# EAGLE board NixieDriverPower-panel (EAGLE 7.1.0)
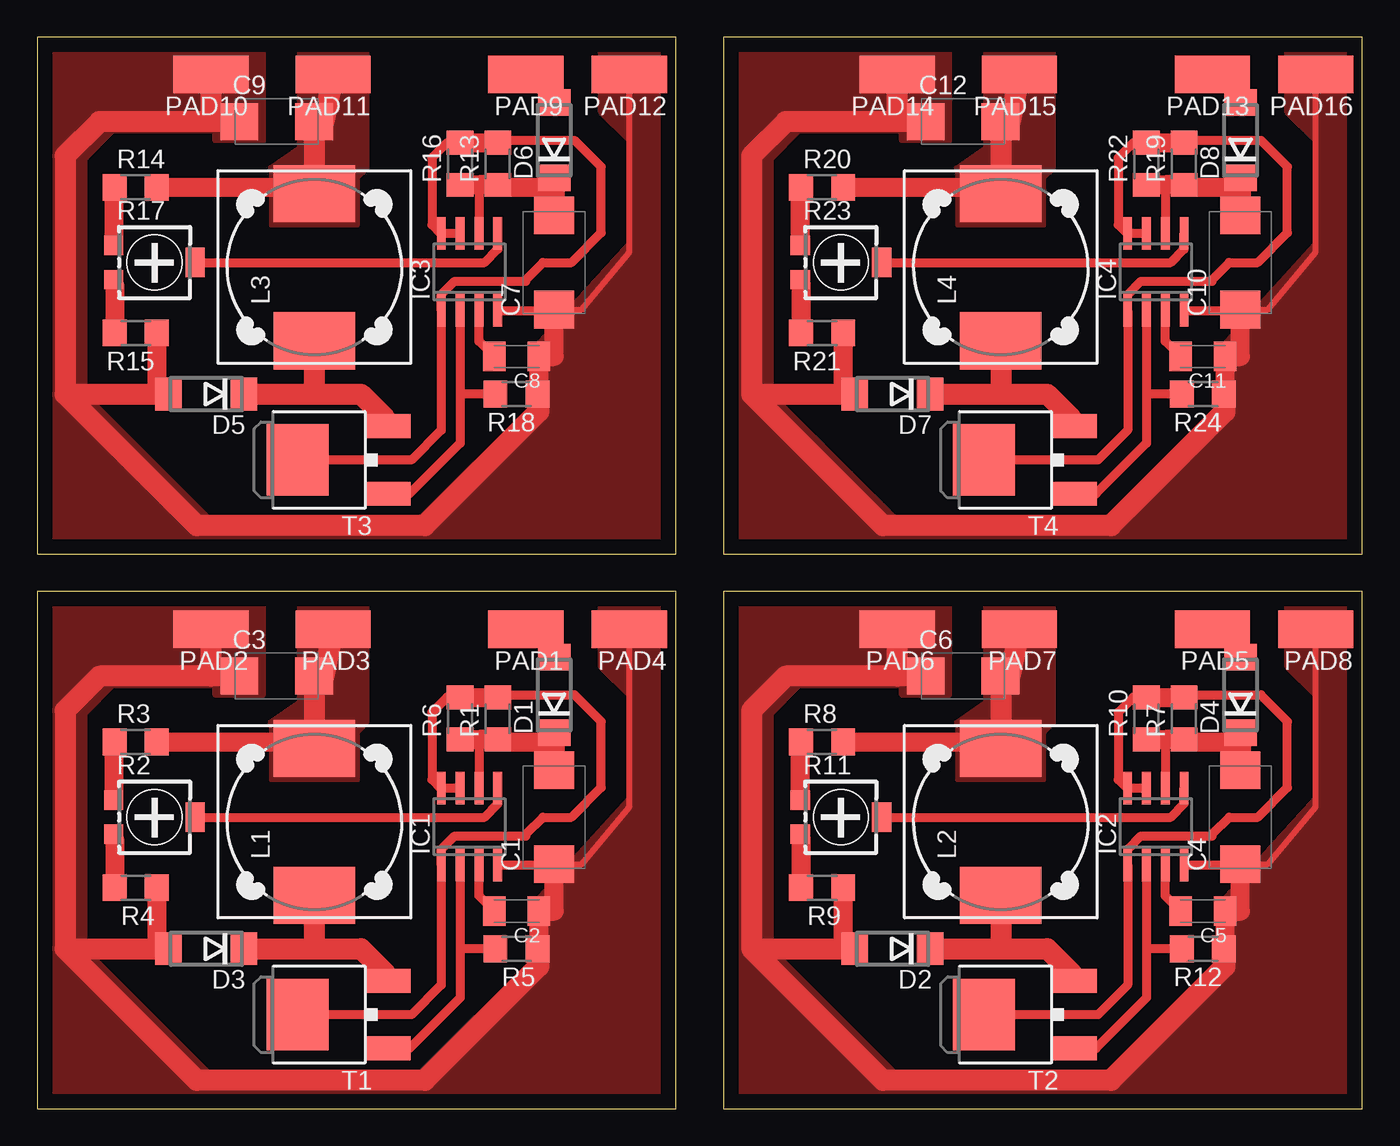
[diagram p0: board, top side]

Size 89.52 x 72.38 mm. Coordinates in mm from the lower left corner, seen from the top.
Outline: 0,0 43.17,0 43.17,34.91 0,34.91 0,0
Outline: 46.36,0 89.52,0 89.52,34.91 46.36,34.91 46.36,0
Outline: 0,37.47 43.17,37.47 43.17,72.38 0,72.38 0,37.47
Outline: 46.36,37.47 89.52,37.47 89.52,72.38 46.36,72.38 46.36,37.47
Copper layers (1*16): Top 0.035mm / dielectric 1.5mm / Bottom 0.035mm
Design rules "default": minimum track width 10mil, minimum drill 24mil, track to track 8mil, track to pad 8mil, pad to pad 8mil, via to via 8mil, smd to smd 8mil, copper to edge 40mil, drill to drill 8mil, minimum pad ring 10mil, minimum via ring 8mil, stop-mask expansion 4mil, vias tented up to drill 0mil, thermal gap 10mil

## Footprints (pad centres in the part's own frame; a part is rotated, then mirrored left to right if it is on the bottom)
D/7343-31R = smd 2.55 x 2.7: + 3.175,0; - -3.175,0
C1206K = smd 1.5 x 2: 1 -1.5,0; 2 1.5,0
C/6032-28R = smd 2.55 x 2.5: + 2.525,0; - -2.525,0
DO214AA = smd 1.8 x 2.2: A 2.55,0; C -2.55,0
SOIC8 = smd 0.6 x 2.2: 1 -1.905,-2.6; 2 -0.635,-2.6; 3 0.635,-2.6; 4 1.905,-2.6; 5 1.905,2.6; 6 0.635,2.6; 7 -0.635,2.6; 8 -1.905,2.6
DR125 = smd 3.85 x 5.5: 1 -4.975,0; 2 4.975,0
SMD2,54-5,08 = smd 2.54 x 5.08: 1 0,0
R1206 = smd 1.6 x 1.803: 1 -1.422,0; 2 1.422,0
RTRIM4G/J = smd 1.3 x 1.3: 1 -1.15,-2.75; 3 1.15,-2.75 | smd 2 x 1.3: 2 0,2.75
DPAK = smd 1.6 x 3: 1 -2.28,-4.04; 3 2.28,-4.04 | smd 4.826 x 4.191: 4 0,2.096

## Placement (x,y rotation side)
C1  100uF  [D/7343-31R]  34.93,19.68 90 top
C2  470pF  [C1206K]  32.39,13.34 180 top
C3  40uF  [C/6032-28R]  16.19,29.21 0 top
C4  100uF  [D/7343-31R]  81.28,19.68 90 top
C5  470pF  [C1206K]  78.74,13.34 180 top
C6  40uF  [C/6032-28R]  62.55,29.21 0 top
C7  100uF  [D/7343-31R]  34.93,57.15 90 top
C8  470pF  [C1206K]  32.39,50.8 180 top
C9  40uF  [C/6032-28R]  16.19,66.67 0 top
C10  100uF  [D/7343-31R]  81.28,57.15 90 top
C11  470pF  [C1206K]  78.74,50.8 180 top
C12  40uF  [C/6032-28R]  62.55,66.67 0 top
D1  MURS120  [DO214AA]  34.93,27.94 90 top
D2  MURS120  [DO214AA]  57.79,10.79 180 top
D3  MURS120  [DO214AA]  11.43,10.79 180 top
D4  MURS120  [DO214AA]  81.28,27.94 90 top
D5  MURS120  [DO214AA]  11.43,48.26 180 top
D6  MURS120  [DO214AA]  34.93,65.41 90 top
D7  MURS120  [DO214AA]  57.79,48.26 180 top
D8  MURS120  [DO214AA]  81.28,65.41 90 top
IC1  MC34063AD  [SOIC8]  29.21,19.05 0 top
IC2  MC34063AD  [SOIC8]  75.56,19.05 0 top
IC3  MC34063AD  [SOIC8]  29.21,56.52 0 top
IC4  MC34063AD  [SOIC8]  75.56,56.52 0 top
L1  220uH  [DR125]  18.73,19.37 90 top
L2  220uH  [DR125]  65.09,19.37 90 top
L3  220uH  [DR125]  18.73,56.83 90 top
L4  220uH  [DR125]  65.09,56.83 90 top
PAD1  [SMD2,54-5,08]  33.02,32.38 90 top
PAD2  [SMD2,54-5,08]  11.75,32.38 90 top
PAD3  [SMD2,54-5,08]  20,32.38 90 top
PAD4  [SMD2,54-5,08]  40.01,32.38 90 top
PAD5  [SMD2,54-5,08]  79.38,32.38 90 top
PAD6  [SMD2,54-5,08]  58.1,32.38 90 top
PAD7  [SMD2,54-5,08]  66.36,32.38 90 top
PAD8  [SMD2,54-5,08]  86.36,32.38 90 top
PAD9  [SMD2,54-5,08]  33.02,69.85 90 top
PAD10  [SMD2,54-5,08]  11.75,69.85 90 top
PAD11  [SMD2,54-5,08]  20,69.85 90 top
PAD12  [SMD2,54-5,08]  40.01,69.85 90 top
PAD13  [SMD2,54-5,08]  79.38,69.85 90 top
PAD14  [SMD2,54-5,08]  58.1,69.85 90 top
PAD15  [SMD2,54-5,08]  66.36,69.85 90 top
PAD16  [SMD2,54-5,08]  86.36,69.85 90 top
R1  0.75  [R1206]  31.11,26.35 90 top
R2  1k  [RTRIM4G/J]  7.94,19.68 270 top
R3  12k  [R1206]  6.67,24.77 0 top
R4  4.7k  [R1206]  6.67,14.92 180 top
R5  1.5k  [R1206]  32.39,10.79 180 top
R6  0.75  [R1206]  28.57,26.35 90 top
R7  0.75  [R1206]  77.47,26.35 90 top
R8  12k  [R1206]  53.02,24.77 0 top
R9  4.7k  [R1206]  53.02,14.92 180 top
R10  0.75  [R1206]  74.93,26.35 90 top
R11  1k  [RTRIM4G/J]  54.29,19.68 270 top
R12  1.5k  [R1206]  78.74,10.79 180 top
R13  0.75  [R1206]  31.11,63.82 90 top
R14  12k  [R1206]  6.67,62.23 0 top
R15  4.7k  [R1206]  6.67,52.39 180 top
R16  0.75  [R1206]  28.57,63.82 90 top
R17  1k  [RTRIM4G/J]  7.94,57.15 270 top
R18  1.5k  [R1206]  32.39,48.26 180 top
R19  0.75  [R1206]  77.47,63.82 90 top
R20  12k  [R1206]  53.02,62.23 0 top
R21  4.7k  [R1206]  53.02,52.39 180 top
R22  0.75  [R1206]  74.93,63.82 90 top
R23  1k  [RTRIM4G/J]  54.29,57.15 270 top
R24  1.5k  [R1206]  78.74,48.26 180 top
T1  MJD31  [DPAK]  19.68,6.35 90 top
T2  MJD31  [DPAK]  66.04,6.35 90 top
T3  MJD31  [DPAK]  19.68,43.81 90 top
T4  MJD31  [DPAK]  66.04,43.81 90 top

## Library data of the parts
C1-C12 R2 R11 R17 R23 = rcl
D1-D8 = diode
IC1-IC4 = mc34063
L1-L4 = inductors
PAD1-PAD16 = wirepad
R1 R3-R10 R12-R16 R18-R22 R24 = rcl-2
T1-T4 = transistor

## Nets
GND: C1.- C2.1 C3.- D3.A IC1.4 PAD2.1 PAD4.1 R4.1 R5.1
GND1: C4.- C5.1 C6.- D2.A IC2.4 PAD6.1 PAD8.1 R9.1 R12.1
GND2: C7.- C8.1 C9.- D5.A IC3.4 PAD10.1 PAD12.1 R15.1 R18.1
GND3: C10.- C11.1 C12.- D7.A IC4.4 PAD14.1 PAD16.1 R21.1 R24.1
N$1: D3.C L1.1 T1.3
N$2: C2.2 IC1.3
N$3: IC1.1 IC1.7 IC1.8 R1.2 R6.2 T1.4
N$4: IC1.2 R5.2 T1.1
N$5: IC2.1 IC2.7 IC2.8 R7.2 R10.2 T2.4
N$6: C3.+ L1.2 PAD3.1 R3.2
N$7: IC1.5 R2.2
N$8: C5.2 IC2.3
N$9: R2.1 R3.1
N$10: R2.3 R4.2
N$11: IC2.5 R11.2
N$12: D1.A PAD1.1
N$13: C6.+ L2.2 PAD7.1 R8.2
N$14: R8.1 R11.1
N$15: R9.2 R11.3
N$16: D4.A PAD5.1
N$17: IC2.2 R12.2 T2.1
N$18: D2.C L2.1 T2.3
N$19: IC3.1 IC3.7 IC3.8 R13.2 R16.2 T3.4
N$20: C8.2 IC3.3
N$21: IC3.5 R17.2
N$22: C9.+ L3.2 PAD11.1 R14.2
N$23: R14.1 R17.1
N$24: R15.2 R17.3
N$25: D6.A PAD9.1
N$26: IC3.2 R18.2 T3.1
N$27: D5.C L3.1 T3.3
N$28: IC4.1 IC4.7 IC4.8 R19.2 R22.2 T4.4
N$29: C11.2 IC4.3
N$30: IC4.5 R23.2
N$31: C12.+ L4.2 PAD15.1 R20.2
N$32: R20.1 R23.1
N$33: R21.2 R23.3
N$34: D8.A PAD13.1
N$35: IC4.2 R24.2 T4.1
N$36: D7.C L4.1 T4.3
VCC: C1.+ D1.C IC1.6 R1.1 R6.1
VCC1: C4.+ D4.C IC2.6 R7.1 R10.1
VCC2: C7.+ D6.C IC3.6 R13.1 R16.1
VCC3: C10.+ D8.C IC4.6 R19.1 R22.1

## Tracks (layer width: path | path; a pad name or v marks a point on that pad's centre or on a via)
GND
  Top 0.406: PAD4.1 40.01,20.39 36.76,16.51 C1.- 34.93,16.45 | C3.- 11.75,29.21 | 33.89,10.79 R5.1
  Top 0.61: IC1.4 34.93,16.45
  Top 1.27: R4.1 8.09,10.79 | 33.89,10.79 C2.1 34.93,13.34 C1.-
  Top 1.422: 11.75,29.21 PAD2.1 | D3.A 8.09,10.79 1.91,10.79 | C3.- 4.23,29.21 1.91,26.89 1.91,10.79 | 33.89,10.79 33.89,9.61 26.18,1.91 10.79,1.91 1.91,10.79
  pour Top (no thermals): 43.18,34.92 43.18,0 0,0 0,34.92 15.24,34.92 15.24,27.94 12.06,27.94 12.06,28.57 5.08,28.57 3.17,26.67 3.17,10.79 11.75,2.22 25.72,2.22 33.66,10.16 33.66,13.97 40.01,20.95 40.01,27.94 38.1,29.84 38.1,34.92
GND1
  Top 0.406: PAD8.1 86.36,20.39 83.12,16.51 C4.- 81.28,16.45 | C6.- 58.1,29.21 | 80.24,10.79 R12.1
  Top 0.61: IC2.4 81.28,16.45
  Top 1.27: R9.1 54.45,10.79 | 80.24,10.79 C5.1 81.28,13.34 C4.-
  Top 1.422: 58.1,29.21 PAD6.1 | D2.A 54.45,10.79 48.26,10.79 | C6.- 50.58,29.21 48.26,26.89 48.26,10.79 | 80.24,10.79 80.24,9.61 72.54,1.91 57.15,1.91 48.26,10.79
  pour Top (no thermals): 89.53,34.92 89.53,0 46.36,0 46.36,34.92 61.59,34.92 61.59,27.94 58.42,27.94 58.42,28.57 51.44,28.57 49.53,26.67 49.53,10.79 58.1,2.22 72.07,2.22 80.01,10.16 80.01,13.97 86.36,20.95 86.36,27.94 84.45,29.84 84.45,34.92
GND2
  Top 0.406: PAD12.1 40.01,57.85 36.76,53.98 C7.- 34.93,53.91 | C9.- 11.75,66.67 | 33.89,48.26 R18.1
  Top 0.61: IC3.4 34.93,53.91
  Top 1.27: R15.1 8.09,48.26 | 33.89,48.26 C8.1 34.93,50.8 C7.-
  Top 1.422: 11.75,66.67 PAD10.1 | D5.A 8.09,48.26 1.91,48.26 | C9.- 4.23,66.67 1.91,64.35 1.91,48.26 | 33.89,48.26 33.89,47.07 26.18,39.37 10.79,39.37 1.91,48.26
  pour Top (no thermals): 43.18,72.39 43.18,37.47 0,37.47 0,72.39 15.24,72.39 15.24,65.41 12.06,65.41 12.06,66.04 5.08,66.04 3.17,64.14 3.17,48.26 11.75,39.69 25.72,39.69 33.66,47.62 33.66,51.44 40.01,58.42 40.01,65.41 38.1,67.31 38.1,72.39
GND3
  Top 0.406: PAD16.1 86.36,57.85 83.12,53.98 C10.- 81.28,53.91 | C12.- 58.1,66.67 | 80.24,48.26 R24.1
  Top 0.61: IC4.4 81.28,53.91
  Top 1.27: R21.1 54.45,48.26 | 80.24,48.26 C11.1 81.28,50.8 C10.-
  Top 1.422: 58.1,66.67 PAD14.1 | D7.A 54.45,48.26 48.26,48.26 | C12.- 50.58,66.67 48.26,64.35 48.26,48.26 | 80.24,48.26 80.24,47.07 72.54,39.37 57.15,39.37 48.26,48.26
  pour Top (no thermals): 89.53,72.39 89.53,37.47 46.36,37.47 46.36,72.39 61.59,72.39 61.59,65.41 58.42,65.41 58.42,66.04 51.44,66.04 49.53,64.14 49.53,48.26 58.1,39.69 72.07,39.69 80.01,47.62 80.01,51.44 86.36,58.42 86.36,65.41 84.45,67.31 84.45,72.39
N$1
  Top 0.406: 23.49,9.18 23.49,8.63
  Top 1.422: L1.1 18.73,10.79 | 18.73,10.79 21.88,10.79 23.49,9.18 | 23.49,8.63 T1.3 | D3.C 18.73,10.79
N$2
  Top 0.61: C2.2 29.84,14.38 IC1.3
N$3
  Top 0.406: 27.3,21.59 IC1.8 | 33.02,18.41 33.02,18.54 | R1.2 31.11,27.94
  Top 0.61: IC1.8 IC1.7 | T1.4 25.3,6.35 27.3,8.36 IC1.1 27.3,17.52 28.2,18.41 33.02,18.41 | R6.2 27.68,27.77 26.67,26.76 26.67,22.23 27.3,21.59 | 33.02,18.54 34.16,19.68 36.09,19.68 38.1,21.69 38.1,26.14 36.3,27.94 31.11,27.94
  Top 1.27: R6.2 R1.2
N$4
  Top 0.61: IC1.2 28.57,10.79 | 28.57,10.79 28.57,7.48 25.16,4.07 T1.1 | R5.2 28.57,10.79
N$5
  Top 0.406: 73.66,21.59 IC2.8 | 79.38,18.41 79.38,18.54 | R7.2 77.47,27.94
  Top 0.61: IC2.8 IC2.7 | T2.4 71.65,6.35 73.66,8.36 IC2.1 73.66,17.52 74.56,18.41 79.38,18.41 | R10.2 74.04,27.77 73.02,26.76 73.02,22.23 73.66,21.59 | 79.38,18.54 80.52,19.68 82.45,19.68 84.45,21.69 84.45,26.14 82.66,27.94 77.47,27.94
  Top 1.27: R10.2 R7.2
N$6
  Top 0.406: 18.1,24.77 L1.2
  Top 1.27: R3.2 18.1,24.77
  Top 1.422: PAD3.1 19.37,29.21 18.73,29.21 | 18.73,29.21 C3.+ | 18.73,29.21 L1.2
  pour Top (no thermals): 15.88,22.23 15.88,26.04 15.73,26.04 17.78,27.45 17.78,34.92 22.22,34.92 22.22,26.04 21.59,25.4 21.59,22.23
N$7
  Top 0.61: R2.2 30.22,19.68 31.11,20.58 IC1.5
N$8
  Top 0.61: C5.2 76.2,14.38 IC2.3
N$9
  Top 0.406: R3.1 5.19,24.45
  Top 1.27: 5.19,24.45 R2.1
N$10
  Top 0.406: R2.3 5.25,18.22
  Top 1.27: 5.25,18.22 R4.2
N$11
  Top 0.61: R11.2 76.57,19.68 77.47,20.58 IC2.5
N$12
  Top 0.406: D1.A 34.93,32.38 PAD1.1
N$13
  Top 0.406: 64.45,24.77 L2.2
  Top 1.27: R8.2 64.45,24.77
  Top 1.422: PAD7.1 65.72,29.21 65.09,29.21 | 65.09,29.21 C6.+ | 65.09,29.21 L2.2
  pour Top (no thermals): 62.23,22.23 62.23,26.04 62.08,26.04 64.13,27.45 64.13,34.92 68.58,34.92 68.58,26.04 67.94,25.4 67.94,22.23
N$14
  Top 0.406: R8.1 51.54,24.45
  Top 1.27: 51.54,24.45 R11.1
N$15
  Top 0.406: R11.3 51.6,18.22
  Top 1.27: 51.6,18.22 R9.2
N$16
  Top 0.406: D4.A 81.28,32.38 PAD5.1
N$17
  Top 0.61: IC2.2 74.93,10.79 | 74.93,10.79 74.93,7.48 71.52,4.07 T2.1 | R12.2 74.93,10.79
N$18
  Top 0.406: 69.85,9.18 69.85,8.63
  Top 1.422: L2.1 65.09,10.79 | 65.09,10.79 68.23,10.79 69.85,9.18 | 69.85,8.63 T2.3 | D2.C 65.09,10.79
N$19
  Top 0.406: 27.3,59.05 IC3.8 | 33.02,55.88 33.02,56.01 | R13.2 31.11,65.41
  Top 0.61: IC3.8 IC3.7 | T3.4 25.3,43.81 27.3,45.82 IC3.1 27.3,54.98 28.2,55.88 33.02,55.88 | R16.2 27.68,65.24 26.67,64.23 26.67,59.69 27.3,59.05 | 33.02,56.01 34.16,57.15 36.09,57.15 38.1,59.16 38.1,63.61 36.3,65.41 31.11,65.41
  Top 1.27: R16.2 R13.2
N$20
  Top 0.61: C8.2 29.84,51.84 IC3.3
N$21
  Top 0.61: R17.2 30.22,57.15 31.11,58.05 IC3.5
N$22
  Top 0.406: 18.1,62.23 L3.2
  Top 1.27: R14.2 18.1,62.23
  Top 1.422: PAD11.1 19.37,66.67 18.73,66.67 | 18.73,66.67 C9.+ | 18.73,66.67 L3.2
  pour Top (no thermals): 15.88,59.69 15.88,63.5 15.73,63.5 17.78,64.92 17.78,72.39 22.22,72.39 22.22,63.5 21.59,62.87 21.59,59.69
N$23
  Top 0.406: R14.1 5.19,61.91
  Top 1.27: 5.19,61.91 R17.1
N$24
  Top 0.406: R17.3 5.25,55.68
  Top 1.27: 5.25,55.68 R15.2
N$25
  Top 0.406: D6.A 34.93,69.85 PAD9.1
N$26
  Top 0.61: IC3.2 28.57,48.26 | 28.57,48.26 28.57,44.95 25.16,41.53 T3.1 | R18.2 28.57,48.26
N$27
  Top 0.406: 23.49,46.64 23.49,46.09
  Top 1.422: L3.1 18.73,48.26 | 18.73,48.26 21.88,48.26 23.49,46.64 | 23.49,46.09 T3.3 | D5.C 18.73,48.26
N$28
  Top 0.406: 73.66,59.05 IC4.8 | 79.38,55.88 79.38,56.01 | R19.2 77.47,65.41
  Top 0.61: IC4.8 IC4.7 | T4.4 71.65,43.81 73.66,45.82 IC4.1 73.66,54.98 74.56,55.88 79.38,55.88 | R22.2 74.04,65.24 73.02,64.23 73.02,59.69 73.66,59.05 | 79.38,56.01 80.52,57.15 82.45,57.15 84.45,59.16 84.45,63.61 82.66,65.41 77.47,65.41
  Top 1.27: R22.2 R19.2
N$29
  Top 0.61: C11.2 76.2,51.84 IC4.3
N$30
  Top 0.61: R23.2 76.57,57.15 77.47,58.05 IC4.5
N$31
  Top 0.406: 64.45,62.23 L4.2
  Top 1.27: R20.2 64.45,62.23
  Top 1.422: PAD15.1 65.72,66.67 65.09,66.67 | 65.09,66.67 C12.+ | 65.09,66.67 L4.2
  pour Top (no thermals): 62.23,59.69 62.23,63.5 62.08,63.5 64.13,64.92 64.13,72.39 68.58,72.39 68.58,63.5 67.94,62.87 67.94,59.69
N$32
  Top 0.406: R20.1 51.54,61.91
  Top 1.27: 51.54,61.91 R23.1
N$33
  Top 0.406: R23.3 51.6,55.68
  Top 1.27: 51.6,55.68 R21.2
N$34
  Top 0.406: D8.A 81.28,69.85 PAD13.1
N$35
  Top 0.61: IC4.2 74.93,48.26 | 74.93,48.26 74.93,44.95 71.52,41.53 T4.1 | R24.2 74.93,48.26
N$36
  Top 0.406: 69.85,46.64 69.85,46.09
  Top 1.422: L4.1 65.09,48.26 | 65.09,48.26 68.23,48.26 69.85,46.64 | 69.85,46.09 T4.3 | D7.C 65.09,48.26
VCC
  Top 0.406: R1.1 31.11,24.77
  Top 0.61: 29.84,24.93 IC1.6
  Top 1.27: R1.1 29.84,24.93 R6.1 | 31.11,24.77 34.93,24.77
  Top 1.422: D1.C 34.93,24.77 C1.+
VCC1
  Top 0.406: R7.1 77.47,24.77
  Top 0.61: 76.2,24.93 IC2.6
  Top 1.27: R7.1 76.2,24.93 R10.1 | 77.47,24.77 81.28,24.77
  Top 1.422: D4.C 81.28,24.77 C4.+
VCC2
  Top 0.406: R13.1 31.11,62.23
  Top 0.61: 29.84,62.4 IC3.6
  Top 1.27: R13.1 29.84,62.4 R16.1 | 31.11,62.23 34.93,62.23
  Top 1.422: D6.C 34.93,62.23 C7.+
VCC3
  Top 0.406: R19.1 77.47,62.23
  Top 0.61: 76.2,62.4 IC4.6
  Top 1.27: R19.1 76.2,62.4 R22.1 | 77.47,62.23 81.28,62.23
  Top 1.422: D8.C 81.28,62.23 C10.+